# EAGLE board PD-adder (EAGLE 6.6.0)
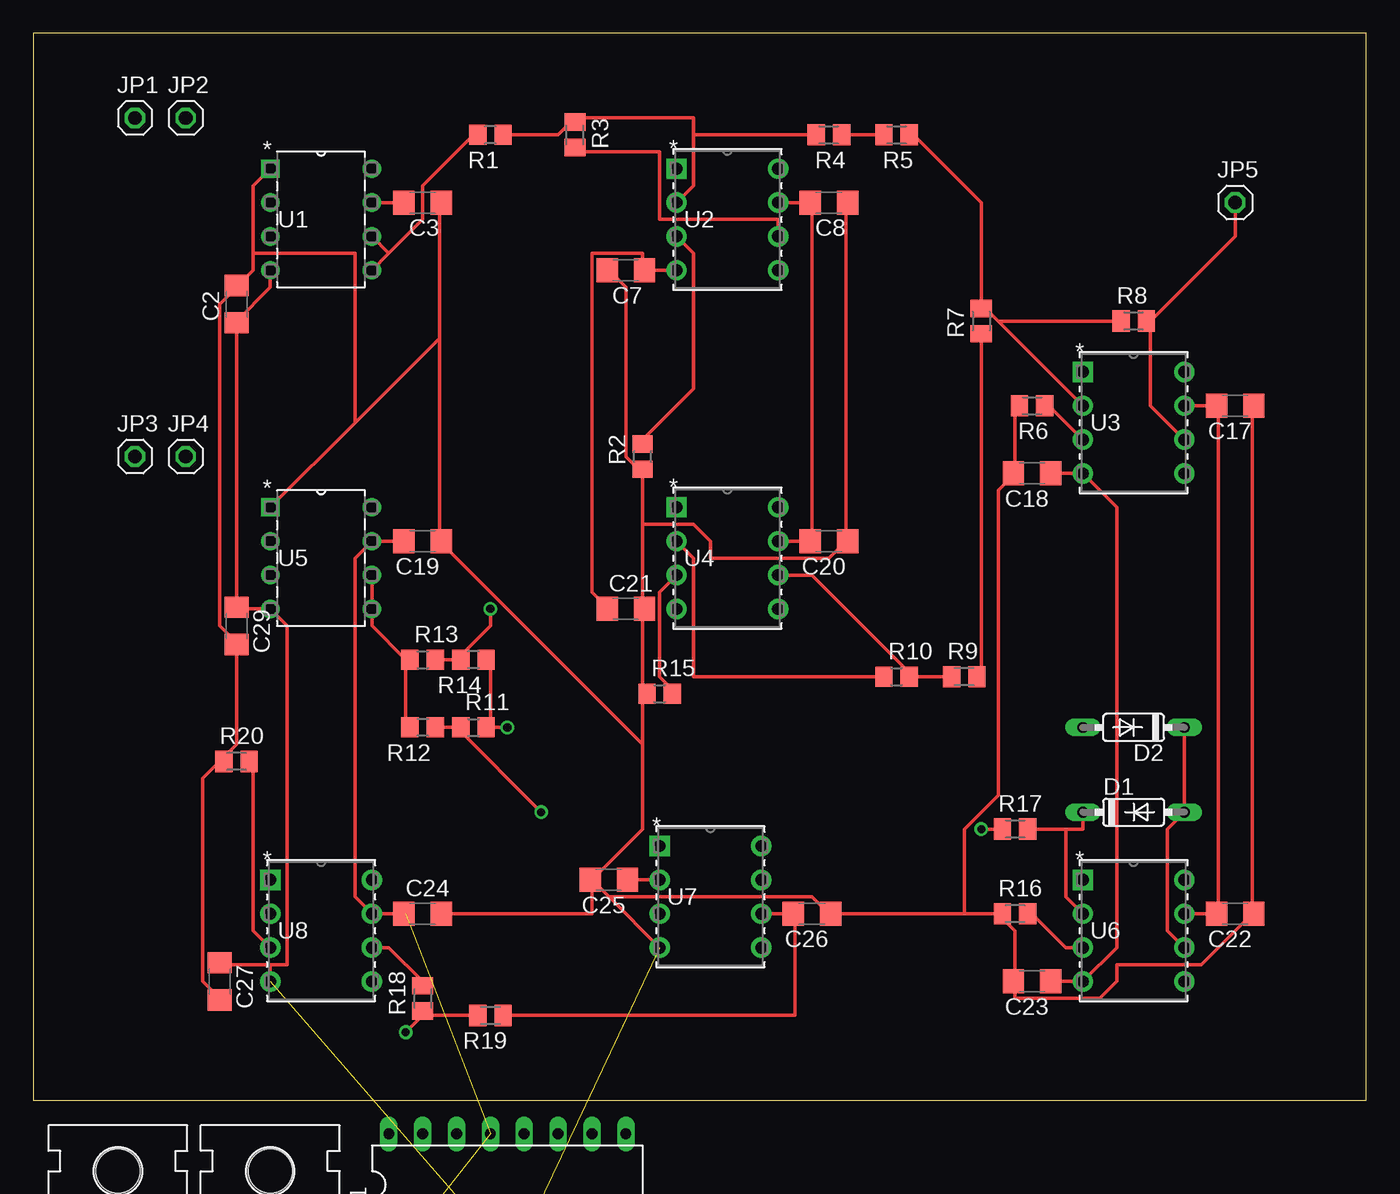
[diagram p0: board, top side]
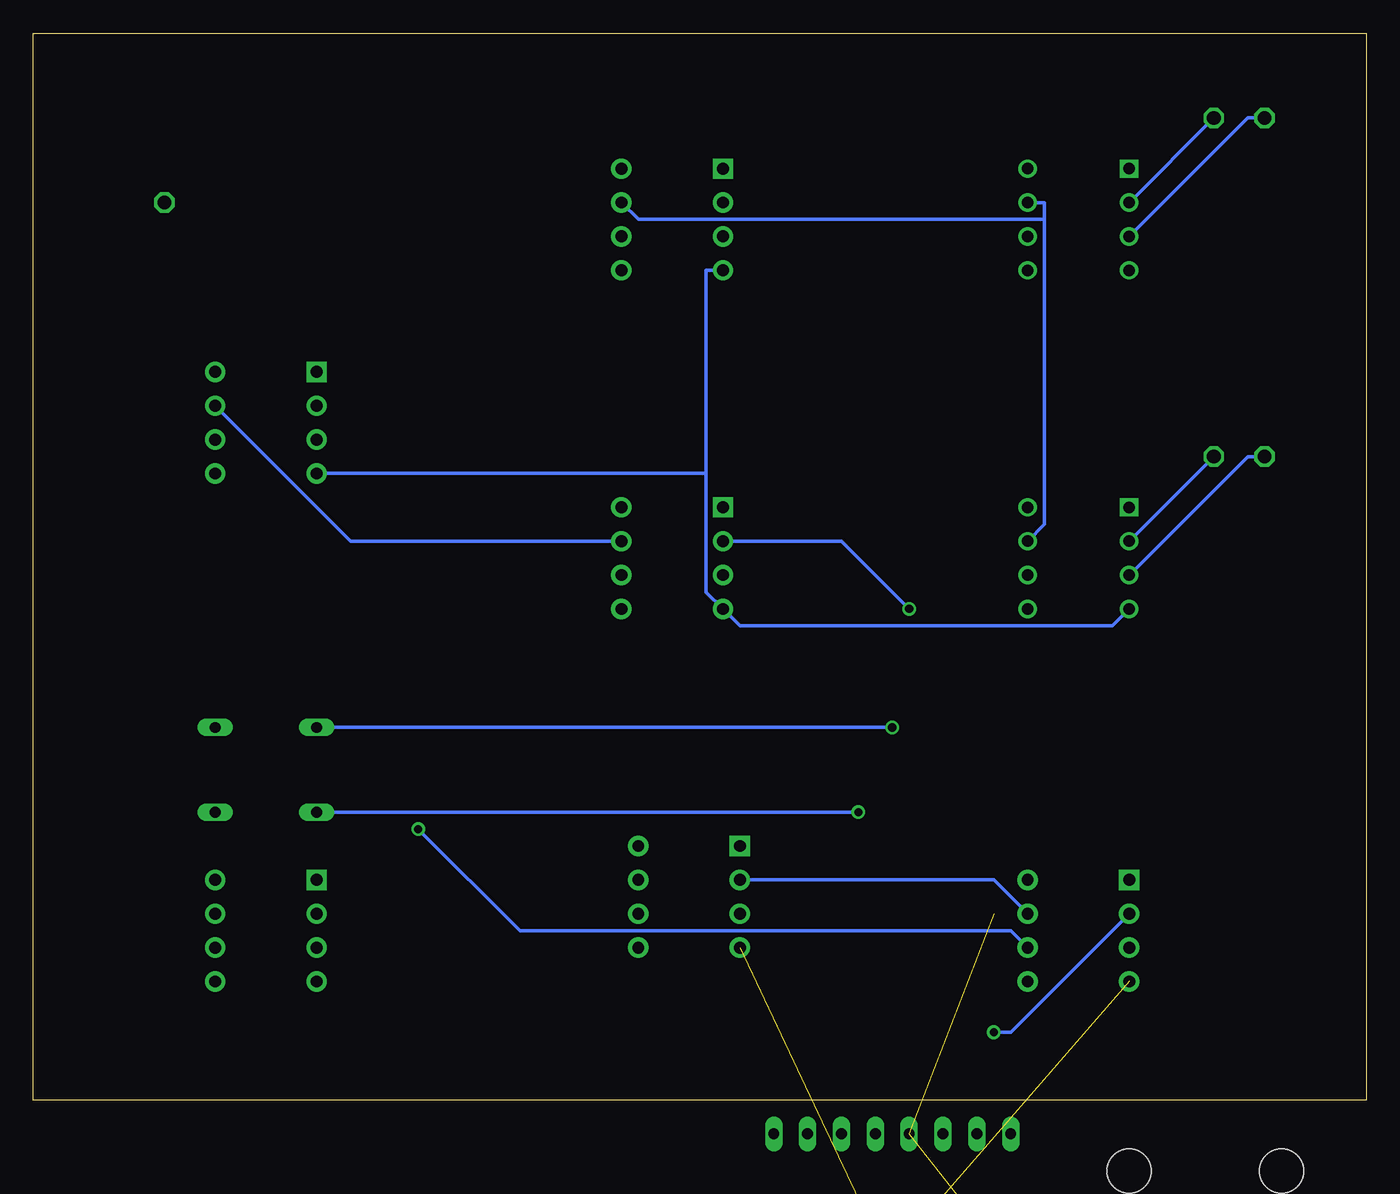
[diagram p1: board, bottom side, seen from below]

Size 100 x 80 mm. Coordinates in mm from the lower left corner, seen from the top.
Outline: 0,0 100,0 100,80 0,80 0,0
Copper layers (1*16): Top 0.035mm / dielectric 1.5mm / Bottom 0.035mm
Design rules "default": minimum track width 10mil, minimum drill 24mil, track to track 8mil, track to pad 8mil, pad to pad 8mil, via to via 8mil, smd to smd 8mil, copper to edge 40mil, drill to drill 8mil, minimum pad ring 10mil, minimum via ring 8mil, stop-mask expansion 4mil, vias tented up to drill 0mil, thermal gap 10mil
Net classes: 1 GND: width 0.406 mm, drill 0.61 mm, clearance 0.178 mm; 2 +15V: width 0.406 mm, drill 0.61 mm, clearance 0.178 mm; 3 -15V: width 0.406 mm, drill 0.61 mm, clearance 0.178 mm; 4 +18V: width 0.406 mm, drill 0.61 mm, clearance 0.178 mm; 5 -18V: width 0.406 mm, drill 0.61 mm, clearance 0.61 mm

## Footprints (pad centres in the part's own frame; a part is rotated, then mirrored left to right if it is on the bottom)
ES-2,5 = drill 0.61 pad 1.27 octagon: 1 -1.27,0; 2 1.27,0
C1206@1 = smd 1.6 x 1.8: 1 -1.4,0; 2 1.4,0
C0805 = smd 1.3 x 1.5: 1 -0.85,0; 2 0.85,0
DO35-7 = drill 0.813 long: A 3.81,0; C -3.81,0
DIL16 = drill 0.813 long: 1 -8.89,-3.81; 2 -6.35,-3.81; 3 -3.81,-3.81; 4 -1.27,-3.81; 5 1.27,-3.81; 6 3.81,-3.81; 7 6.35,-3.81; 8 8.89,-3.81; 9 8.89,3.81; 10 6.35,3.81; 11 3.81,3.81; 12 1.27,3.81; 13 -1.27,3.81; 14 -3.81,3.81; 15 -6.35,3.81; 16 -8.89,3.81
79XXL = drill 1.016 long: GND -2.54,-3.81; IN 0,-3.81; OUT 2.54,-3.81 | hole 3.302: 0,11.176
78XXL = drill 1.016 long: GND 0,-3.81; IN -2.54,-3.81; OUT 2.54,-3.81 | hole 3.302: 0,11.176
DIL14 = drill 0.813 long: 1 -7.62,-3.81; 2 -5.08,-3.81; 3 -2.54,-3.81; 4 0,-3.81; 5 2.54,-3.81; 6 5.08,-3.81; 7 7.62,-3.81; 8 7.62,3.81; 9 5.08,3.81; 10 2.54,3.81; 11 0,3.81; 12 -2.54,3.81; 13 -5.08,3.81; 14 -7.62,3.81
1X01 = drill 1.016 octagon: 1 0,0
10X03MTA = drill 1.016 long: 1 2.54,0; 2 0,0; 3 -2.54,0
R0805 = smd 1.3 x 1.5: 1 -0.95,0; 2 0.95,0
M0805 = smd 1.3 x 1.6: 1 -0.95,0; 2 0.95,0
P8 = drill 0.864 pad 1.372 square: 1 -7.62,7.62 | drill 0.864 pad 1.372: 2 -7.62,5.08; 3 -7.62,2.54; 4 -7.62,0; 5 0,0; 6 0,2.54; 7 0,5.08; 8 0,7.62
Q_8_ADI = drill 0.889 pad 1.524 square: 1 0,0 | drill 0.889 pad 1.524: 2 0,-2.54; 3 0,-5.08; 4 0,-7.62; 5 7.62,-7.62; 6 7.62,-5.08; 7 7.62,-2.54; 8 7.62,0

## Placement (x,y rotation side)
C1  [ES-2,5]  22.86,-40.64 0 top  (outside the outline)
C2  100nF  [C1206@1]  15.24,59.69 90 top
C3  100nF  [C1206@1]  29.21,67.31 180 top
C4  [ES-2,5]  27.94,-40.64 0 top  (outside the outline)
C5  [ES-2,5]  33.02,-40.64 0 top  (outside the outline)
C6  [ES-2,5]  38.1,-40.64 0 top  (outside the outline)
C7  100nF  [C1206@1]  44.45,62.23 180 top
C8  100nF  [C1206@1]  59.69,67.31 180 top
C9  [ES-2,5]  43.18,-40.64 0 top  (outside the outline)
C10  [ES-2,5]  2.54,-53.34 0 top  (outside the outline)
C11  [ES-2,5]  7.62,-53.34 0 top  (outside the outline)
C12  [ES-2,5]  12.7,-53.34 0 top  (outside the outline)
C13  100 nf  [C0805]  29.21,-50.8 0 top  (outside the outline)
C14  100 nf  [C0805]  36.83,-50.8 0 top  (outside the outline)
C15  100 nf  [C0805]  2.54,-58.42 0 top  (outside the outline)
C16  100 nf  [C0805]  10.16,-58.42 0 top  (outside the outline)
C17  100nF  [C1206@1]  90.17,52.07 180 top
C18  [C1206@1]  74.93,46.99 180 top
C19  100nF  [C1206@1]  29.21,41.91 180 top
C20  100nF  [C1206@1]  59.69,41.91 180 top
C21  100nF  [C1206@1]  44.45,36.83 0 top
C22  100nF  [C1206@1]  90.17,13.97 180 top
C23  100nF  [C1206@1]  74.93,8.89 180 top
C24  100nF  [C1206@1]  29.21,13.97 0 top
C25  100nF  [C1206@1]  43.18,16.51 180 top
C26  10uF  [C1206@1]  58.42,13.97 180 top
C27  100nF  [C1206@1]  13.97,8.89 270 top
C28  100 nf  [C0805]  17.78,-58.42 0 top  (outside the outline)
C29  [C1206@1]  15.24,35.56 270 top
C30  100 nf  [C0805]  25.4,-58.42 0 top  (outside the outline)
C31  100 nf  [C0805]  33.02,-58.42 0 top  (outside the outline)
C32  100 nf  [C0805]  40.64,-58.42 0 top  (outside the outline)
D1  1N4148DO35-7  [DO35-7]  82.55,21.59 0 top
D2  1N4148DO35-7  [DO35-7]  82.55,27.94 180 top
IC1  ADG221KN  [DIL16]  35.56,-6.35 0 top
IC4  [79XXL]  6.35,-16.51 0 top  (outside the outline)
IC5  [78XXL]  17.78,-16.51 0 top  (outside the outline)
IC6  LF347N  [DIL14]  34.29,-29.21 0 top  (outside the outline)
IC7  LF347N  [DIL14]  11.43,-41.91 0 top  (outside the outline)
IC8  ADG222KN  [DIL16]  12.7,-29.21 0 top  (outside the outline)
JP1  [1X01]  7.62,73.66 0 top
JP2  [1X01]  11.43,73.66 0 top
JP3  [1X01]  7.62,48.26 0 top
JP4  [1X01]  11.43,48.26 0 top
JP5  [1X01]  90.17,67.31 0 top
POWER_IN  [10X03MTA]  19.05,-50.8 0 top  (outside the outline)
R1  680  [R0805]  34.29,72.39 180 top
R2  330  [R0805]  45.72,48.26 90 top
R3  680  [M0805]  40.64,72.39 270 top
R4  680  [M0805]  59.69,72.39 180 top
R5  680  [M0805]  64.77,72.39 180 top
R6  330  [M0805]  74.93,52.07 180 top
R7  680  [M0805]  71.12,58.42 90 top
R8  680  [M0805]  82.55,58.42 0 top
R9  680  [M0805]  69.85,31.75 0 top
R10  680  [R0805]  64.77,31.75 0 top
R11  680  [R0805]  33.02,27.94 0 top
R12  680  [R0805]  29.21,27.94 180 top
R13  680  [R0805]  29.21,33.02 0 top
R14  680  [R0805]  33.02,33.02 180 top
R15  330  [R0805]  46.99,30.48 0 top
R16  330  [M0805]  73.66,13.97 0 top
R17  680  [M0805]  73.66,20.32 0 top
R18  680  [M0805]  29.21,7.62 90 top
R19  680  [M0805]  34.29,6.35 180 top
R20  330  [M0805]  15.24,25.4 0 top
U1  INA105KP  [P8]  25.4,62.23 0 top
U2  OP27EZ  [Q_8_ADI]  48.26,69.85 0 top
U3  OP27EZ  [Q_8_ADI]  78.74,54.61 0 top
U4  OP27EZ  [Q_8_ADI]  48.26,44.45 0 top
U5  INA105KP  [P8]  25.4,36.83 0 top
U6  OP27EZ  [Q_8_ADI]  78.74,16.51 0 top
U7  REF01EZ  [Q_8_ADI]  46.99,19.05 0 top
U8  OP27EZ  [Q_8_ADI]  17.78,16.51 0 top

## Library data of the parts
C1 C4-C6 C9-C12 = discrete
C2 C3 C7 C8 C13-C32 R3-R20 = rcl
D1 D2 = diode
IC1 IC6-IC8 = linear
IC4 IC5 = v-reg
JP1-JP5 = pinhead
POWER_IN = con-amp
R1 R2 = eagle-ltspice; SPICEMODEL: NONE; SPICEPREFIX: R
U1 U5 = INA105KP; COPYRIGHT: Copyright (C) 2021 Ultra Librarian. All rights reserved.; MANUFACTURER_PART_NUMBER: INA105KP; MFR_NAME: Texas Instruments
U2-U4 U6 U8 = OP27EPZ; COPYRIGHT: Copyright (C) 2021 Ultra Librarian. All rights reserved.; MANUFACTURER_PART_NUMBER: OP27EZ; MFR_NAME: Analog Devices Inc
U7 = REF01EZ; COPYRIGHT: Copyright (C) 2021 Ultra Librarian. All rights reserved.; MANUFACTURER_PART_NUMBER: REF01EZ; MFR_NAME: Analog Devices Inc

## Nets
+15V: C3.2 C8.2 C9.1 C10.1 C13.1 C15.1 C17.2 C19.2 C20.2 C22.2 C24.1 C25.1 C31.1 C32.1 IC1.13 IC5.OUT IC6.4 IC7.4 IC8.13 U1.7 U2.7 U3.7 U4.7 U5.7 U6.7 U7.2 U8.7
+18V [+18V]: C1.1 C5.1 IC5.IN POWER_IN.3
-15V: C2.1 C7.1 C11.2 C12.2 C14.2 C16.2 C18.1 C21.1 C23.1 C27.1 C28.2 C29.1 C30.2 IC1.4 IC4.OUT IC6.11 IC7.11 IC8.4 U1.4 U2.4 U3.4 U4.4 U5.4 U6.4 U8.4
-18V [-18V]: C4.2 C6.2 IC4.IN POWER_IN.1
GND: C1.2 C2.2 C3.1 C4.1 C5.2 C6.1 C7.2 C8.1 C9.2 C10.2 C11.1 C12.1 C13.2 C14.1 C15.2 C16.1 C17.1 C18.2 C19.1 C20.1 C21.2 C22.1 C23.2 C24.2 C25.2 C26.1 C27.2 C28.1 C29.2 C30.1 C31.2 C32.2 IC1.5 IC4.GND IC5.GND IC8.5 POWER_IN.2 R2.1 R6.2 R15.1 R16.1 R20.1 U1.1 U5.1 U7.4
N$2: R2.2 U2.3
N$3: R3.2 U2.6
N$4: R4.1 R5.2
N$5: R5.1 R7.2 R8.1 U3.2
N$6: R7.1 R9.2
N$7: R9.1 R10.2 U4.6
N$8: R10.1 R13.2 R14.2 U4.2
N$9: R15.2 U4.3
N$10: D2.A R11.2 R14.1
N$11: R12.2 R13.1 U5.5 U5.6
N$12: D1.C R11.1 R12.1 R17.2 U6.2
N$13: R16.2 U6.3
N$14: R20.2 U8.3
N$15: R1.1 R3.1 R4.2 U2.2
N$16: R6.1 U3.3
N$17: R17.1 R18.2 U8.6
N$18: D1.A D2.C U6.6
N$20: R18.1 R19.2 U8.2
N$21: C26.2 R19.1 U7.6
V_OUT: JP5.1 R8.2 U3.6
VHI-IN+: JP1.1 U1.3
VHI-IN-: JP2.1 U1.2
VLO-IN+: JP3.1 U5.3
VLO-IN-: JP4.1 U5.2
VOUT: R1.2 U1.5 U1.6

## Tracks (layer width: path | path; a pad name or v marks a point on that pad's centre or on a via)
+15V  (11 unrouted)
  Top 0.254: U6.7 C22.2 88.9,13.97 88.9,52.07 C17.2 U3.7 | U4.7 C20.2 58.42,41.91 58.42,67.31 C8.2 U2.7 | 27.94,13.97 C24.1 U8.7 24.13,15.24 24.13,40.64 U5.7 C19.2 27.94,41.91 | U7.2 C25.1 44.45,16.51 | U1.7 C3.2 27.94,67.31
  Bottom 0.254: U8.7 27.94,16.51 U7.2 | U5.7 24.13,43.18 24.13,66.04 | 24.13,66.04 24.13,67.31 U1.7 | U2.7 54.61,66.04 24.13,66.04 | U3.7 76.2,41.91 U4.7
+18V  (3 unrouted)
-15V  (11 unrouted)
  Top 0.254: 76.2,8.89 C23.1 U6.4 81.28,11.43 81.28,44.45 U3.4 C18.1 76.2,46.99 | C21.1 43.18,36.83 41.91,38.1 41.91,63.5 45.72,63.5 45.72,62.23 C7.1 U2.4 | 17.78,10.16 13.97,10.16 C27.1 | U8.4 17.78,10.16 | U1.4 17.78,60.96 15.24,58.42 C2.1 C29.1 15.24,36.83 U5.4 19.05,35.56 19.05,10.16 17.78,10.16
  Bottom 0.254: 49.53,46.99 49.53,62.23 U2.4 | 49.53,46.99 49.53,38.1 U4.4 46.99,35.56 19.05,35.56 U5.4 | 49.53,46.99 U3.4
-18V  (3 unrouted)
GND  (21 unrouted)
  Top 0.254: 13.97,25.4 15.24,26.67 C29.2 15.24,34.29 13.97,35.56 13.97,59.69 15.24,60.96 | 13.97,25.4 12.7,24.13 12.7,8.89 13.97,7.62 C27.2 | 13.97,25.4 R20.1 | 15.24,60.96 16.51,62.23 16.51,63.5 | 16.51,63.5 16.51,68.58 U1.1 | 30.48,57.15 30.48,67.31 C3.1 | 30.48,57.15 30.48,41.91 | 30.48,57.15 24.13,50.8 | 24.13,50.8 U5.1 | 16.51,63.5 24.13,63.5 24.13,50.8 | 15.24,60.96 C2.2 | 91.44,13.97 91.44,52.07 C17.1 | 73.66,46.99 73.66,52.07 R6.2 | 72.39,13.97 73.66,12.7 73.66,8.89 | 72.39,13.97 69.85,13.97 | 69.85,13.97 C26.1 59.69,13.97 58.42,15.24 43.18,15.24 | 72.39,13.97 R16.1 | 73.66,46.99 72.39,45.72 72.39,22.86 69.85,20.32 69.85,13.97 | 73.66,46.99 C18.2 | 91.44,13.97 87.63,10.16 81.28,10.16 81.28,8.89 80.01,7.62 73.66,7.62 73.66,8.89 | 91.44,13.97 C22.1 | 73.66,8.89 C23.2 | 60.96,41.91 60.96,67.31 C8.1 | 41.91,16.51 41.91,13.97 C24.2 30.48,13.97 | 41.91,16.51 43.18,15.24 | 43.18,15.24 U7.4 | 45.72,36.83 45.72,30.48 | 45.72,36.83 45.72,43.18 | 45.72,43.18 45.72,46.99 | 45.72,36.83 C21.2 | 45.72,46.99 44.45,48.26 44.45,60.96 43.18,62.23 C7.2 | 45.72,46.99 R2.1 | 41.91,16.51 45.72,20.32 45.72,26.67 | 45.72,30.48 45.72,26.67 | 41.91,16.51 C25.2 | 45.72,30.48 R15.1 | 60.96,41.91 59.69,40.64 50.8,40.64 50.8,41.91 49.53,43.18 45.72,43.18 | 60.96,41.91 C20.1 | 45.72,26.67 30.48,41.91 | 30.48,41.91 C19.1
N$2
  Top 0.254: U2.3 49.53,63.5 49.53,53.34 45.72,49.53 R2.2
N$3
  Top 0.254: U2.6 55.88,66.04 46.99,66.04 46.99,71.12 40.64,71.12 R3.2
N$4
  Top 0.254: R5.2 R4.1
N$5
  Top 0.254: U3.2 72.39,58.42 | 72.39,58.42 71.12,59.69 | 71.12,59.69 71.12,67.31 66.04,72.39 R5.1 | 71.12,59.69 R7.2 | 72.39,58.42 R8.1
N$6
  Top 0.254: R7.1 71.12,31.75 R9.2
N$7
  Top 0.254: R9.1 66.04,31.75 | 66.04,31.75 58.42,39.37 U4.6 | 66.04,31.75 R10.2
N$8  (via drill 0.61)
  Top 0.254: 31.75,33.02 R13.2 | R10.1 49.53,31.75 49.53,40.64 U4.2 | 31.75,33.02 34.29,35.56 v34.29,36.83 | 31.75,33.02 R14.2
  Bottom 0.254: v34.29,36.83 39.37,41.91 U4.2
N$9
  Top 0.254: U4.3 46.99,38.1 46.99,31.75 48.26,30.48 R15.2
N$10  (via drill 0.61)
  Top 0.254: 34.29,27.94 34.29,33.02 R14.1 | 34.29,27.94 v35.56,27.94 | 34.29,27.94 R11.2
  Bottom 0.254: v35.56,27.94 D2.A
N$11
  Top 0.254: 27.94,33.02 27.94,27.94 R12.2 | U5.6 U5.5 25.4,35.56 27.94,33.02 | 27.94,33.02 R13.1
N$12  (via drill 0.61)
  Top 0.254: 31.75,27.94 R12.1 | 77.47,20.32 78.74,20.32 D1.C | 77.47,20.32 R17.2 | v38.1,21.59 31.75,27.94 | 31.75,27.94 R11.1 | U6.2 77.47,15.24 77.47,20.32
  Bottom 0.254: D1.C v38.1,21.59
N$13
  Top 0.254: U6.3 77.47,11.43 74.93,13.97 R16.2
N$14
  Top 0.254: U8.3 16.51,12.7 16.51,25.4 R20.2
N$15
  Top 0.254: R1.1 39.37,72.39 40.64,73.66 | 49.53,72.39 R4.2 | 49.53,72.39 49.53,68.58 U2.2 | 40.64,73.66 49.53,73.66 49.53,72.39 | 40.64,73.66 R3.1
N$16
  Top 0.254: U3.3 76.2,52.07 R6.1
N$17  (via drill 0.61)
  Top 0.254: U8.6 26.67,11.43 29.21,8.89 R18.2 | v71.12,20.32 R17.1
  Bottom 0.254: v71.12,20.32 63.5,12.7 26.67,12.7 U8.6
N$18
  Top 0.254: D2.C D1.A 85.09,20.32 85.09,12.7 U6.6
N$20  (via drill 0.61)
  Top 0.254: R19.2 29.21,6.35 | 29.21,6.35 v27.94,5.08 | 29.21,6.35 R18.1
  Bottom 0.254: U8.2 26.67,5.08 v27.94,5.08
N$21
  Top 0.254: R19.1 57.15,6.35 57.15,13.97 C26.2 U7.6
V_OUT
  Top 0.254: 83.82,58.42 90.17,64.77 JP5.1 | U3.6 83.82,52.07 83.82,58.42 | 83.82,58.42 R8.2
VHI-IN+
  Bottom 0.254: U1.3 8.89,73.66 JP1.1
VHI-IN-
  Bottom 0.254: JP2.1 U1.2
VLO-IN+
  Bottom 0.254: U5.3 8.89,48.26 JP3.1
VLO-IN-
  Bottom 0.254: JP4.1 U5.2
VOUT
  Top 0.254: U1.5 26.67,63.5 | 26.67,63.5 29.21,66.04 29.21,68.58 33.02,72.39 R1.2 | 26.67,63.5 U1.6